# Altium PCB JTAGICE SMD.PcbDoc
Units mm, origin at the board's own origin, x right, y up, seen from the top; angles counter-clockwise.
Board outline 102.05 x 44.18 mm, 2 copper layers (Top Layer, Bottom Layer); 40 components, 35 nets, 194 pads, 33 vias.
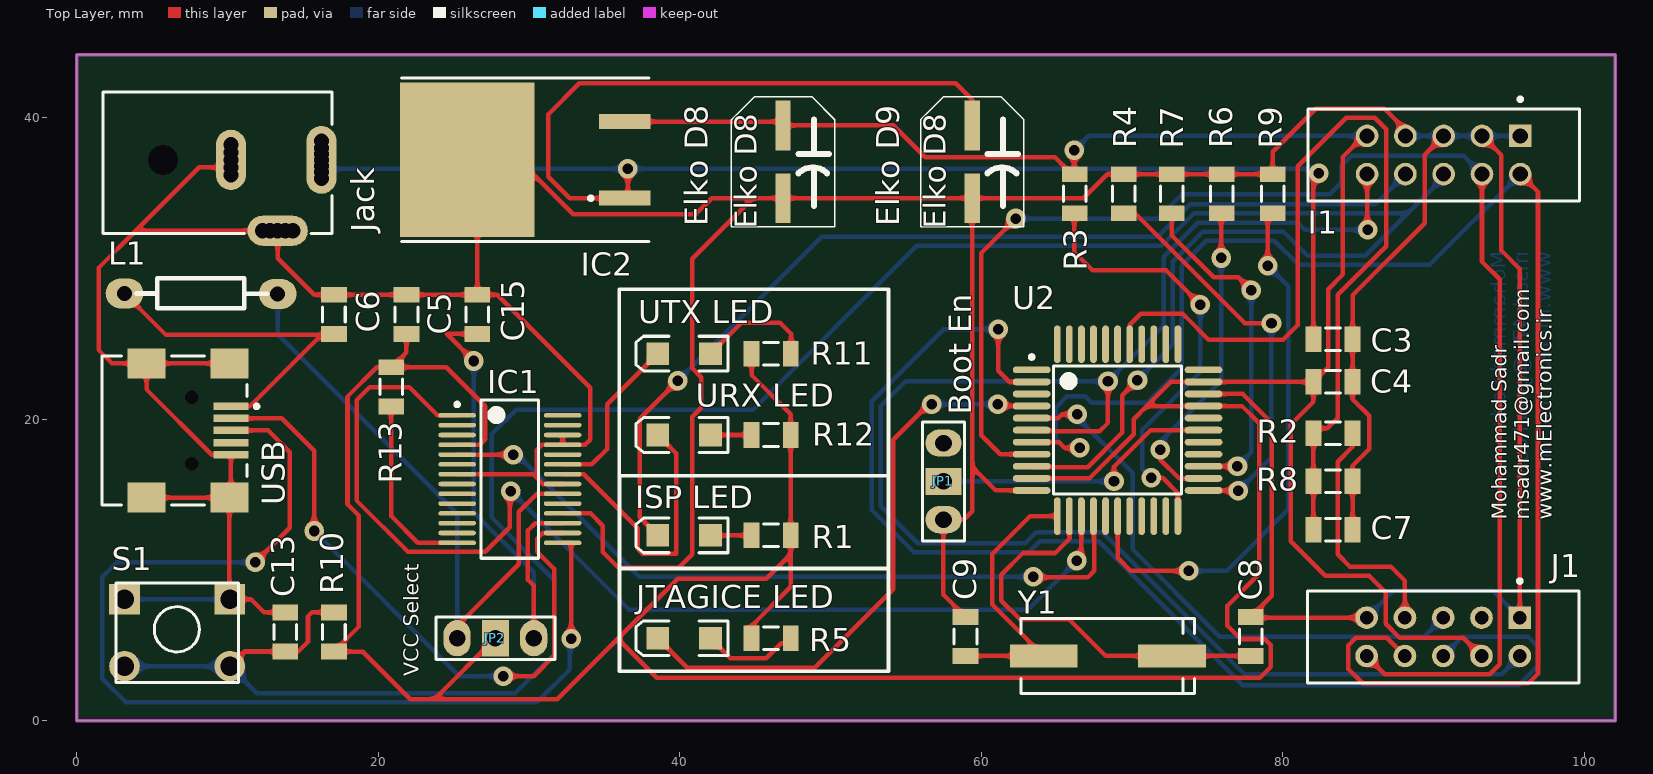
[diagram p0: Top Layer view]
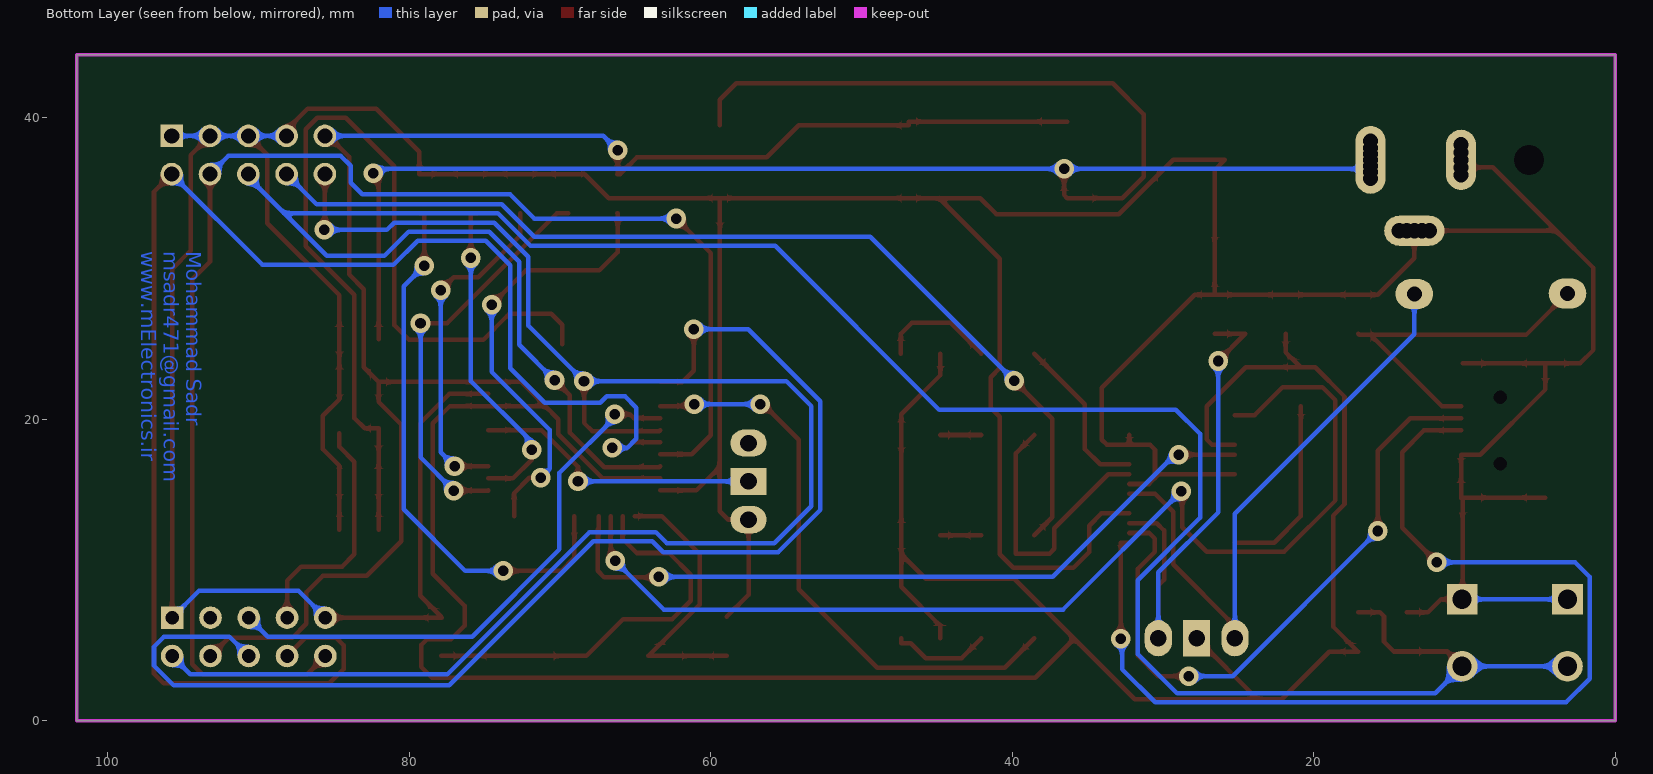
[diagram p1: Bottom Layer view, seen from below]
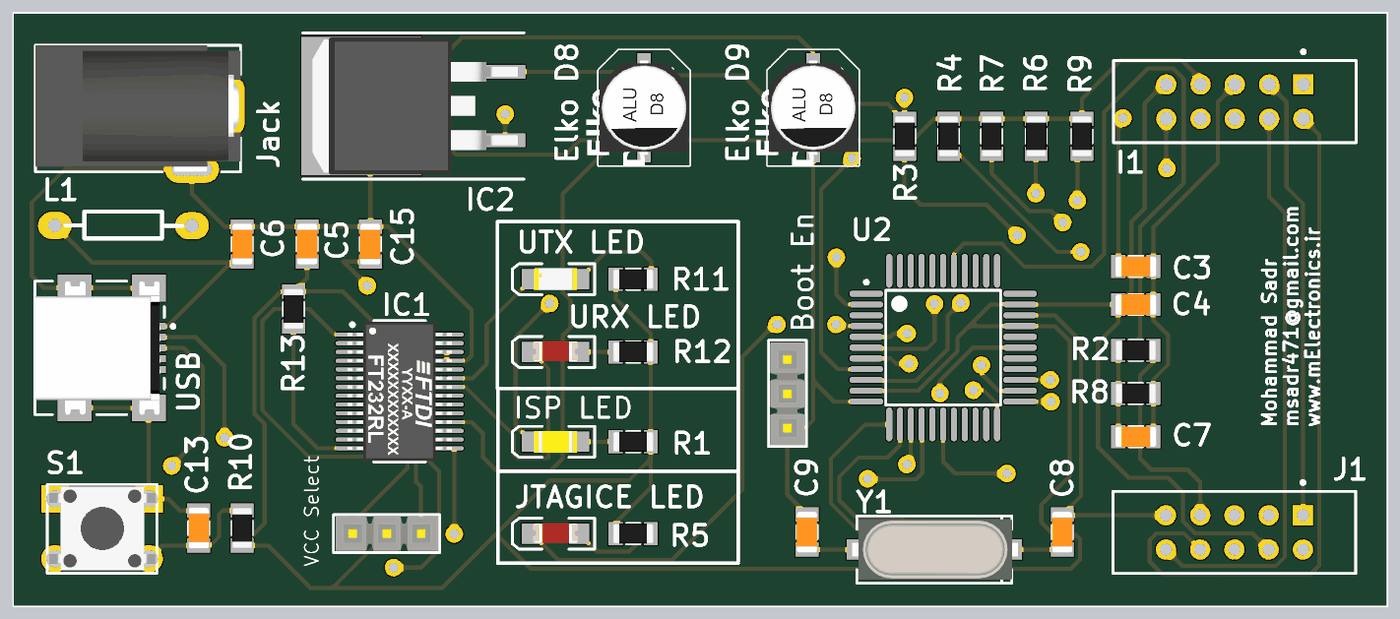
[diagram p2: 3D render of the assembled board from above, using the file's embedded part models]

## Layer stack, top to bottom
Top Solder: solder mask 0.0102, Solder Resist, Dk 3.5
Top Layer: signal copper 0.0356
Dielectric 1: dielectric 0.32, FR-4, Dk 4.8
Bottom Layer: signal copper 0.0356
Bottom Solder: solder mask 0.0102, Solder Resist, Dk 3.5

## Board outline
0,0 102.05,0 102.05,44.18 0,44.18

## Design rules (kind name [scope] priority, off if disabled: settings)
Clearance [All] p1: gap=0.3 ignorepadtopadclearanceinfootprint=FALSE
HoleToHoleClearance [All] p1: gap=0 allowstackedmicrovias=TRUE
MinimumSolderMaskSliver [All] p1: minsoldermaskwidth=0.1
PlaneClearance [All] p1: clearance=0.3
PlaneConnect [All] p1: planeconnectstyle=Relief reliefexpansion=0.3 reliefentries=4 reliefconductorwidth=0.3 reliefairgap=0.3
PolygonConnect [All] p1: connectstyle=Relief reliefconductorwidth=0.254 reliefentries=4 polygonreliefangle="90 Angle" airgapwidth=0.3
RoutingVias [All] p1: holewidth=0.7 width=1.3 viastyle="Through Hole" minholewidth=0.7 minwidth=1.3 maxholewidth=0.7 maxwidth=1.3
SMDNeckDown [All] p1: percent=100.000
SilkToSilkClearance [All] p1: silktosilkclearance=0
SilkToSolderMaskClearance [IsPad] p1: minsilkscreentomaskgap=0 clearancetoexposedcopper=TRUE
SolderMaskExpansion [All] p1: expansion=0.1
Width [All] p1: maxlimit=0.3 minlimit=0.3 preferedwidth=0.3 minimp=50.000000 maximp=50.000000 favimp=50.000000
24 further rules are at their usual default settings.

## Components (designator, comment, footprint, x,y, rotation, side; value= is the part's Value field where it differs from the comment)
C3 "100nF" SMD_CAP_1206 82.03,25.31 r0 top
C4 "100nF" SMD_CAP_1206 82.03,22.48 r0 top
C5 "100nF" SMD_CAP_1206 21.87,25.664 r90 top
C6 "100nF" SMD_CAP_1206 17.06,25.664 r90 top
C7 "100nF" SMD_CAP_1206 82.03,12.68 r0 top
C8 "22pF" SMD_CAP_1206 77.88,6.896 r270 top
C9 "22pF" SMD_CAP_1206 58.95,6.896 r270 top
C13 "100nF" SMD_CAP_1206 13.83,4.597 r90 top
C15 "100nF" SMD_CAP_1206 26.57,28.26 r270 top
"Elko D8" "100uF" "Elko D8 package" 46.856,34.667 r90 top
"Elko D9" "100uF" "Elko D8 package" 59.4,34.667 r90 top
I1 "ISP" 9181109621#1 90.67,37.528 r180 top
IC1 "FT232RL" SSOP-28_M 28.73,16.032 r0 top
IC2 "L78M05" TO-263 31.125,37.208 r90 top
"ISP LED" "Red" "LED SMD 1206" 40.29,12.297 r180 top
J1 "JTAG" 9181109621#2 90.64,5.57 r180 top
Jack "Power Jack" "Power Jack" 1.73,37.208 r0 top
JP1 "Boot En" "jumper selector" 57.49,18.42 r270 top
JP2 "VCC Select" "jumper selector" 25.23,5.477 r0 top
"JTAGICE LED" "Green" "LED SMD 1206" 40.29,5.477 r180 top
L1 "Ferrite-bead" Ferrite-bead 3.17,28.345 r180 top
R1 "470R" SMD_RES_1206 44.76,12.297 r0 top
R2 "36K" SMD_RES_1206 82.03,19.08 r0 top
R3 "10K" SMD_RES_1206 66.19,33.662 r90 top
R4 "10K" SMD_RES_1206 69.44,33.662 r90 top
R5 "100R" SMD_RES_1206 44.76,5.477 r0 top
R6 "10K" SMD_RES_1206 75.94,33.662 r90 top
R7 "10K" SMD_RES_1206 72.64,33.662 r90 top
R8 "150K" SMD_RES_1206 84.626,15.88 r180 top
R9 "10K" SMD_RES_1206 79.33,36.258 r270 top
R10 "10K" SMD_RES_1206 17.06,4.598 r90 top
R11 "470R" SMD_RES_1206 44.76,24.357 r0 top
R12 "470R" SMD_RES_1206 47.356,18.957 r180 top
R13 "10K" SMD_RES_1206 20.87,23.453 r270 top
S1 "Switch PB" "Switch - Push to On" 6.663,5.837 r0 top
U2 "ATmega16A-PU" 44A_M 69.04,19.28 r0 top
"URX LED" "Red" "LED SMD 1206" 40.29,18.957 r180 top
USB "USB mini" "SMD_Mini USB Connector" 2.38,19.258 r180 top
"UTX LED" "Green" "LED SMD 1206" 40.29,24.357 r180 top
Y1 "7.3728 MHz" "Crystal SMD" 68.957,4.3 r180 top

## Footprints (in the part's own frame and the unit in brackets; to place one, negate y for a bottom-side part, rotate by r counter-clockwise, add the part's x,y. Pads: shape width x height; smd on the part's side, far side on the other; paste and mask are expansions set on the pad)
44A_M [mm] "Thin QFP, 44-Leads, Body 10x10mm, Pitch 0.8mm, IPC Low Density"
  oval 2.5x0.45 smd: 1(-5.7,4) 2(-5.7,3.2) 3(-5.7,2.4) 4(-5.7,1.6) 5(-5.7,0.8) 6(-5.7,0) 7(-5.7,-0.8) 8(-5.7,-1.6) 9(-5.7,-2.4) 10(-5.7,-3.2) 11(-5.7,-4) 23(5.7,-4) 24(5.7,-3.2) 25(5.7,-2.4) 26(5.7,-1.6) 27(5.7,-0.8) 28(5.7,0) 29(5.7,0.8) 30(5.7,1.6) 31(5.7,2.4) 32(5.7,3.2) 33(5.7,4)
  oval 0.45x2.5 smd: 12(-4,-5.7) 13(-3.2,-5.7) 14(-2.4,-5.7) 15(-1.6,-5.7) 16(-0.8,-5.7) 17(0,-5.7) 18(0.8,-5.7) 19(1.6,-5.7) 20(2.4,-5.7) 21(3.2,-5.7) 22(4,-5.7) 34(4,5.7) 35(3.2,5.7) 36(2.4,5.7) 37(1.6,5.7) 38(0.8,5.7) 39(0,5.7) 40(-0.8,5.7) 41(-1.6,5.7) 42(-2.4,5.7) 43(-3.2,5.7) 44(-4,5.7)
  silkscreen extent -5.82,-4.25 4.25,4.97, body extent -5,-5 5,5, height 1.2
9181109621#1 [mm] "Connector; IDC, PCB Transition - 2 Rows, Thru-Hole; 10 Position; Vertical; Pitch 2.54 mm; Body 18.00 x 6.1 x 7.45 mm (LxWxH)"
  rect 1.5x1.5 hole 1: 1(-5.08,-1.27)
  round 1.5 hole 1: 2(-5.08,1.27) 3(-2.54,-1.27) 4(-2.54,1.27) 5(0,-1.27) 6(0,1.27) 7(2.54,-1.27) 8(2.54,1.27) 9(5.08,-1.27) 10(5.08,1.27)
  silkscreen extent -9,-3.82 9,3.05
9181109621#2 [mm] "Connector; IDC, PCB Transition - 2 Rows, Thru-Hole; 10 Position; Vertical; Pitch 2.54 mm; Body 18.00 x 6.1 x 7.45 mm (LxWxH)"
  rect 1.5x1.5 hole 0.9: 1(-5.08,-1.27)
  round 1.5 hole 0.9: 2(-5.08,1.27) 3(-2.54,-1.27) 4(-2.54,1.27) 5(0,-1.27) 6(0,1.27) 7(2.54,-1.27) 8(2.54,1.27) 9(5.08,-1.27) 10(5.08,1.27)
  silkscreen extent -9,-3.82 9,3.05
"Crystal SMD" [mm]
  rect 4.5x1.5 smd: 1(-3.683,0) 2(4.817,0)
  silkscreen extent -5.18,-2.5 6.32,2.5, body extent -5.64,-2.25 6.66,2.25, height 5.18
"Elko D8 package" [mm]
  rect 3.3x1 smd: 1(0,0) 2(4.826,0)
  silkscreen extent -1.9,-3.43 6.73,3.43, body extent -1.09,-3.3 5.91,3.3, height 7.7
Ferrite-bead [mm]
  oval 2.5x2 hole 1: 1(0,0) 2(-10.16,0.025)
  silkscreen extent -9.45,-1.02 -0.79,0.96
"jumper selector" [mm]
  oval 1.8x2.4 hole 1.1: 1(0,0) 3(5.08,0)
  rect 1.8x2.4 hole 1.1: 2(2.54,0)
  silkscreen extent -1.4,-1.4 6.48,1.4, body extent -1.24,-1.27 6.38,1.27, height 10.16
"LED SMD 1206" [mm]
  rect 1.5x1.5 smd: 1(-1.75,0) 2(1.75,0)
  silkscreen extent -2.9,-1.15 3.2,1.15, body extent -1.6,-0.8 1.6,0.8, height 1.11
"Power Jack" [mm] "Power Adaptor Jack"
  round 1.5 hole 1: 1(14.5,-1.25) 1(14.5,-0.8) 1(14.5,-0.4) 1(14.5,0.4) 1(14.5,0.8) 1(14.5,1.25) 2(8.5,-1) 2(8.5,-0.5) 2(8.5,0.5) 2(8.5,1) 3(10.6,-4.7) 3(11.1,-4.7) 3(12.1,-4.7) 3(12.6,-4.7)
  oval 2x4.5 hole 1: 1(14.5,0)
  oval 2x4 hole 1: 2(8.5,0)
  oval 4x2 hole 1: 3(11.6,-4.7)
  round 1.9 hole 2: MH(4,0)
  silkscreen extent 0,-4.9 15.2,4.5, body extent 0,-4.9 15.2,4.5, height 11
SMD_CAP_1206 [mm]
  rect 1.05x1.7 smd: 1(0,0) 2(2.596,0)
  silkscreen extent 0.8,-0.75 1.8,0.75, body extent -0.22,-0.77 2.82,0.75, height 0.75
"SMD_Mini USB Connector" [mm]
  rect 2.3x0.5 smd: 1(-7.85,-1.6) 2(-7.85,-0.8) 3(-7.85,0) 4(-7.85,0.8) 5(-7.85,1.6)
  rect 2.5x2 smd: 6(-7.75,4.45) 7(-2.25,4.45) 8(-7.75,-4.45) 9(-2.25,-4.45)
  round 0.6 hole 0.9 unplated: MH1(-5.25,2.2) MH2(-5.25,-2.2)
  silkscreen extent -9.68,-4.95 0.7,4.95, body extent -8.6,-4.95 0.65,4.95, height 3.93
SMD_RES_1206 [mm] "Chip Resistor, 2-Leads, Body 3.2x1.6mm, IPC High Density _ (0.125 W)"
  rect 1.05x1.7 smd: 1(0,0) 2(2.596,0)
  silkscreen extent 0.8,-0.75 1.8,0.75, body extent -0.23,-0.76 2.82,0.76, height 0.6
SSOP-28_M [mm] "SOP, 28-Leads, Body 10.2x5.3mm, Pitch 0.65mm, IPC Low Density"
  oval 2.5x0.3 smd: 1(-3.5,4.225) 2(-3.5,3.575) 3(-3.5,2.925) 4(-3.5,2.275) 5(-3.5,1.625) 6(-3.5,0.975) 7(-3.5,0.325) 8(-3.5,-0.325) 9(-3.5,-0.975) 10(-3.5,-1.625) 11(-3.5,-2.275) 12(-3.5,-2.925) 13(-3.5,-3.575) 14(-3.5,-4.225) 15(3.5,-4.225) 16(3.5,-3.575) 17(3.5,-2.925) 18(3.5,-2.275) 19(3.5,-1.625) 20(3.5,-0.975) 21(3.5,-0.325) 22(3.5,0.325) 23(3.5,0.975) 24(3.5,1.625) 25(3.5,2.275) 26(3.5,2.925) 27(3.5,3.575) 28(3.5,4.225)
  silkscreen extent -3.62,-5.25 1.9,5.25, body extent -3.88,-5.17 3.88,5.17, height 2.16
"Switch - Push to On" [mil]
  rect 80x80 hole 50: 1(-137.5,87.5) 1(137.5,87.5)
  round 80 hole 50: 2(-137.5,-87.5) 2(137.5,-87.5)
  silkscreen extent -160,-130 160,130, body extent -155,-121 157,123, height 205
TO-263 [mm] "D2-PAK/TO-263-AB; 3 Leads (1 Cropped); Body 15.9 (inc. leads) x 10.4 mm (LxW max)"
  rect 1x3.4 smd: 1(-2.54,-5.225) 3(2.54,-5.225)
  rect 10.25x8.9 smd: 4(0,5.225)
  silkscreen extent -5.43,-6.82 5.43,9.57, body extent -5.08,-6.4 5.08,8.86, height 4.98

## Part data
C3 C4 C5 C6 C7 C8 C9 C13 C15: library part Cap-Bipolar, "Bipolar Capacitor", Voltage=100V, Adding Date=1387/12/20, Designer="Saeid Jorablo", Organazation=ControTec
"Elko D8" "Elko D9": library part "Elko D8 package", Elko D8 package=100uF
I1 J1: library part "09 18 110 9621", "Flat Cable Connector (IDC), PCB Transition Connector, 2 Rows, Solder Pin, 10 Contacts", PackageDocument=26-Nov-2003, ComponentLink1Description="Manufacturer Link", ComponentLink1URL=http://www.harting.com/, ComponentLink2Description="Selection Guide", ComponentLink2URL=http://www.harting.com/imperia/md/content/steckverbinderundsystemkomponenten/folder/interface_engl_chapter_09.pdf, DatasheetDocument=Sep-2003, DrillSize="Corresponds to nominal value.", PackageReference=9181109621, PCB_Layout="Complies with manufacturer's recommendation.", Published=15-Nov-2004, Publisher="Altium Limited"
IC1: "USB UART Asynchronous Serial Data Transfer Chip, SSOP-28, Tape and Reel", ComponentLink1Description="Manufacturer Link", ComponentLink1URL=http://www.ftdichip.com/Products/ICs/FT232R.htm, ComponentLink2Description=Datasheet, ComponentLink2URL=http://www.ftdichip.com/Support/Documents/DataSheets/ICs/DS_FT232R.pdf, DatasheetVersion="ver 2.07, Jul-2010", PackageDescription="28-Pin Small Outline Package 0.65 mm Pitch", PackageReference=SSOP-28, PackageVersion=2010, Published=19-Aug-2010, Publisher="Altium Limited"
IC2: "Precision 500mA Regulator"
"ISP LED" "JTAGICE LED" "URX LED" "UTX LED": library part LED, "LED", Adding Date=1387/12/22, Designer="Saeid Jorablo", Organazation=ControTec, Size="SMD 1206"
  "ISP LED" "URX LED": Color=Red
  "JTAGICE LED" "UTX LED": Color=Green
JP1 JP2: library part "Jumper Selector", "Jumper Selector"
R1 R2 R3 R4 R5 R6 R7 R8 R9 R10 R11 R12 R13: library part Resistor, "Resistor", Power="1/4 W", Tolerance=5%
S1: "Push Button Switch"
U2: "8-bit AVR Microcontroller, 16KB Flash, 512 Bytes EEPROM, 1KB SRAM, 40-pin PDIP, Industrial Grade (-40°C to 85°C)", Supplier Part Number 1=ATMEGA16A-PU-ND, Code_JEDEC=MS-011-AC, ComponentLink1Description="Manufacturer Link", ComponentLink1URL=http://www.atmel.com/products/avr/default.asp?, ComponentLink2Description="ATmega16A Datasheet", ComponentLink2URL=http://www.atmel.com/dyn/resources/prod_documents/doc8154.pdf, ComponentLink3Description="ATmega16A Summary", ComponentLink3URL=http://www.atmel.com/dyn/resources/prod_documents/8154S.pdf, ComponentLink4Description="Atmel.com Home", ComponentLink4URL=http://www.atmel.com, DatasheetVersion="revB, Jul-2009", PackageDescription="40-lead (0.600\"/15.24mm Wide) Plastic Dual Inline Package (PDIP)", PackageReference=40P6, PackageVersion="revB, Sep-2001", Published=1-Apr-2010, Publisher="Altium Limited", Supplier 1=Digi-Key, Supplier 2=Farnell, Supplier 3=Mouser, Supplier Part Number 2=1704561, Supplier Part Number 3=556-ATMEGA16A-PU
USB: "mini USB Connector"
Y1: library part XTAL, "XTAL Crystal", Company=E.P.I.L, Design Date=11/04/2011
Jack: Adding Date=10/21/2009, Company=Personal, Designer="Saeid Jorablo", Project Name=Laser

## Via types
v1: diameter 1.3, hole 0.7, Top Layer to Bottom Layer, 33 vias

## Nets (pads, with @x,y where several pads share a name; then routed paths per layer and width w, separated by ;. In a path a pad name is that pad's centre, name@x,y a point inside that pad or via, vN(x,y) a via of type N, cw(c..) or ccw(c..) an arc to the next point about the centre after c; other vN are vias at no path point)
GND: "Elko D8.1" "Elko D9.1" C3.2 C4.2 C5.2 C6.2 C7.2 C8.1 C9.1 C13.2 C15.1 I1.1 I1.3 I1.5 I1.7 IC1.7 IC1.18 IC1.21 IC1.25 IC1.26 IC2.4 J1.1 J1.9 Jack.2 Jack.3 JP1.3 R4.2 R6.2 R7.2 R8.1 R9.1 S1.1 U2.11 U2.31 USB.5 USB.6 USB.7 USB.8 USB.9 | length 374.7
  Top Layer w0.3: USB.7 USB.6 10.13,8.085 10.155,8.06 11.556,8.06 12.423,7.193 C13.2 ; USB.8 USB.9 ; USB.6@10.23,14.77 USB.5 8.952,17.657 4.63,21.979 USB.9 ; Jack.2@10.23,38.208 10.23,37.708 10.23,37.208 10.23,36.708 8.115,36.708 3.915,32.508 ; IC1.7 30.275,16.357 30.53,16.102 ; IC1.18 34.082,13.757 34.894,12.945 34.894,11.197 35.94,10.151 39.928,10.151 40.817,11.04 40.817,20.159 41.426,20.768 41.426,22.787 40.817,23.397 40.817,30.654 44.83,34.668 ; IC1.21 30.925,15.707 30.53,16.102 ; IC1.26 IC1.25 ; C9.1 57.49,8.356 JP1.3 58.843,13.34 59.4,13.897 59.4,16.83 ; U2.11 60.95,15.28 59.4,16.83 ; U2.31 77.34,21.68 79.27,19.75 79.27,8.286 C8.1 ; C8.1@77.84,6.84 J1.9 ; R9.1 R9.1@79.323,36.258 ; C7.2 R8.1 84.626,16.927 85.724,18.025 85.724,20.229 84.626,21.327 C4.2 C3.2 84.626,28.23 89.407,33.011 89.407,37.535 I1.5 ; I1.7 88.13,39.208 86.74,40.598 82.186,40.598 79.323,37.735 R9.1@79.323,36.258 ; I1.3 94.5,37.508 94.5,31.19 95.72,29.97 J1.1 ; 3.915,32.508 1.447,30.039 1.447,24.596 2.336,23.707 USB.9 ; 3.915,32.508 12.33,32.508 12.83,32.508 13.33,32.508 13.33,30.676 15.746,28.26 C6.2 C5.2 C15.1 ; C15.1 26.57,36.538 IC2.4 29.311,37.208 32.923,33.595 41.045,33.595 42.118,34.668 44.83,34.668 ; C15.1 27.888,28.26 34.06,22.088 34.06,18.65 33.717,18.307 IC1.25 ; 30.53,16.102 30.53,17.977 30.86,18.307 IC1.25 ; 44.83,34.668 46.856,34.668 59.4,34.668 ; 59.4,16.83 59.4,17.855 59.39,17.865 59.39,34.658 59.4,34.668 ; 59.4,34.668 66.76,34.668 68.35,36.258 R4.2 R7.2 R6.2 77.621,36.258 R9.1@79.323,36.258
  Bottom Layer w0.3: S1.1@3.17,8.06 S1.1@10.155,8.06 ; Jack.2@10.23,36.708 10.23,37.208 Jack.2@10.23,37.708 ; Jack.3@13.33,32.508 Jack.3@13.83,32.508 ; J1.9 87.34,8.62 93.94,8.62 J1.1 ; I1.7 I1.5 I1.3 I1.1
LED: "ISP LED.2" I1.8 | length 65.7
  Top Layer w0.3: 38.54,12.297 37.337,13.5 37.337,20.032 v1(39.863,22.557)
  Bottom Layer w0.3: v1(39.863,22.557) 49.42,32.115 71.704,32.115 73.861,34.271 86.143,34.271 I1.8
MISO: I1.2 J1.8 U2.7 | length 103.1
  Top Layer w0.3: U2.7 65.152,18.48 65.532,18.1 v1(66.52,18.1) ; J1.8 87.497,4.903 87.492,4.903 86.892,5.503 84.835,5.503 84.352,5.02 84.352,3.42 85.292,2.48 96.29,2.48 96.925,3.115 96.925,35.083 I1.2
  Bottom Layer w0.3: v1(66.52,18.1) 65.532,18.1 64.93,18.702 64.93,20.77 65.68,21.52 66.9,21.52 67.321,21.098 71.017,21.098 73.296,23.377 73.296,30.21 74.926,31.841 79.44,31.841 81.04,30.241 89.733,30.241 I1.2
MOSI: I1.10 J1.2 U2.6 | length 107.3
  Top Layer w0.3: U2.6 63.42,19.2 67.844,19.2 68.402,19.758 v1(68.402,22.525) ; I1.10 85.59,32.884 85.266,32.56 v1(85.63,32.56)
  Bottom Layer w0.3: v1(85.63,32.56) 81.48,32.56 80.999,33.041 74.356,33.041 72.096,30.78 72.096,26.218 v1(68.402,22.525) 54.975,22.525 53.329,20.879 53.329,14.235 55.782,11.783 62.903,11.783 63.631,12.511 68.04,12.511 77.461,3.09 94.51,3.09 J1.2
NetC3_1: "Elko D9.2" C3.1 IC2.1 Jack.1 | length 123.4
  Top Layer w0.3: Jack.1@16.23,36.808 16.23,37.208 16.23,37.608 16.23,38.008 Jack.1@16.23,38.458 ; v1(36.56,36.61) 36.56,34.878 IC2.1 32.699,34.668 31.27,36.097 31.27,40.22 33.34,42.29 58.312,42.29 59.4,41.202 59.4,39.494 ; C3.1 82.03,35.972 v1(82.371,36.313)
  Bottom Layer w0.3: Jack.1@16.23,35.958 Jack.1@16.23,36.313 ; Jack.1@16.23,37.208 16.23,36.808 16.23,36.408 Jack.1@16.23,36.313 ; v1(82.371,36.313) 82.074,36.61 v1(36.56,36.61) 16.527,36.61 Jack.1@16.23,36.313
NetC6_1: C6.1 L1.1 USB.1 | length 23
  Top Layer w0.3: L1.1 5.921,25.594 C6.1@16.23,25.594 ; USB.1 11.493,20.857 C6.1@16.23,25.594 ; C6.1 16.99,25.594 C6.1@16.23,25.594
NetC7_1: C7.1 R2.1 R8.2 U2.38 | length 61
  Top Layer w0.3: U2.38 69.84,26.28 70.57,27.01 73.35,27.01 73.54,26.82 73.54,26.814 75.073,25.282 80.012,25.282 80.982,26.252 80.982,36.778 84.202,39.998 86.105,39.998 86.87,39.233 86.87,31.48 83.641,28.251 83.641,20.082 82.955,19.397 82.03,19.397 R2.1 R8.2 C7.1
NetC8_2: C8.2 U2.13 Y1.1 | length 26.8
  Top Layer w0.3: U2.13 65.84,12.055 64.915,11.13 62.77,11.13 61.33,9.69 61.33,7.959 62.539,6.75 65.799,6.75 68.249,4.3 Y1.1 C8.2
NetC9_2: C9.2 U2.12 Y1.2 | length 18.7
  Top Layer w0.3: C9.2 Y1.2 60.73,7.71 60.73,11.06 63.25,13.58 U2.12
NetC15_2: C15.2 IC1.17 JP2.3 | length 34.4
  Top Layer w0.3: v1(26.339,23.867) 24.542,25.664 C15.2 ; JP2.3 30.31,8.976 29.93,9.356 29.93,12.627 30.41,13.107 IC1.17
  Bottom Layer w0.3: v1(26.339,23.867) 26.339,13.819 30.31,9.847 JP2.3
NetIC1_14: IC1.14 R13.2 | length 12.4
  Top Layer w0.3: R13.2 20.852,20.857 20.852,13.58 22.625,11.807 IC1.14
NetIC1_15: IC1.15 USB.3 | length 71.6
  Top Layer w0.3: USB.3 12.693,19.257 14.13,17.82 14.13,12.801 v1(11.835,10.507) ; IC1.15 32.79,11.807 v1(32.79,5.452)
  Bottom Layer w0.3: v1(11.835,10.507) 2.666,10.507 1.701,9.541 1.701,2.785 3.266,1.22 30.514,1.22 32.714,3.42 32.714,5.376 v1(32.79,5.452)
NetIC1_16: IC1.16 USB.2 | length 42.3
  Top Layer w0.3: USB.2 13.593,20.057 15.747,17.903 v1(15.747,12.59) ; v1(28.28,2.96) 30.311,2.96 31.66,4.309 31.66,10.088 30.53,11.218 30.53,12.077 30.91,12.457 IC1.16
  Bottom Layer w0.3: v1(15.747,12.59) 25.377,2.96 v1(28.28,2.96)
NetIC1_20: IC1.20 JP2.1 L1.2 | length 41.2
  Top Layer w0.3: JP2.1 25.23,6.29 29.33,10.39 29.33,13.858 30.53,15.057 IC1.20
  Bottom Layer w0.3: L1.2 13.33,25.645 25.23,13.745 JP2.1
NetIC1_22: "URX LED.2" IC1.22 | length 18.9
  Top Layer w0.3: IC1.22 33.62,16.357 37.21,12.767 37.21,11.408 37.527,11.091 39.75,11.091 39.75,17.748 38.54,18.957
NetIC1_23: "UTX LED.2" IC1.23 | length 11.1
  Top Layer w0.3: IC1.23 34.16,17.007 35.178,18.025 35.178,20.995 38.54,24.357
"NetISP LED_1": "ISP LED.1" R1.1 | length 2.7
  Top Layer w0.3: 42.04,12.297 R1.1
NetJP1_2: JP1.2 U2.28 | length 19.2
  Top Layer w0.3: v1(68.8,15.88) 68.8,16.857 71.223,19.28 U2.28
  Bottom Layer w0.3: JP1.2 v1(68.8,15.88)
"NetJTAGICE LED_1": "JTAGICE LED.1" R5.2 | length 6.6
  Top Layer w0.3: 42.04,5.477 43.361,4.157 45.744,4.157 46.735,5.147 47.356,5.147 R5.2
"NetJTAGICE LED_2": "JTAGICE LED.2" U2.4 | length 38.8
  Top Layer w0.3: 38.54,5.477 40.496,3.522 48.945,3.522 54.152,8.729 54.152,18.635 56.507,20.99 56.607,20.89 56.717,21 v1(56.72,21) ; v1(61.09,21) 61.21,20.88 U2.4
  Bottom Layer w0.3: v1(56.72,21) v1(61.09,21)
NetR3_1: R3.1 U2.22 | length 29.4
  Top Layer w0.3: R3.1 66.166,33.662 66.166,31.094 67.39,29.87 72.27,29.87 v1(74.53,27.61) ; v1(71.28,16.12) 72.03,16.12 73.04,15.11 U2.22
  Bottom Layer w0.3: v1(71.28,16.12) 70.687,16.713 70.687,19.295 74.53,23.138 v1(74.53,27.61)
NetR4_1: R4.1 U2.23 | length 27.2
  Top Layer w0.3: R4.1 70.198,33.662 77.478,26.382 v1(79.247,26.382) ; U2.23 74.75,15.27 v1(77.04,15.27)
  Bottom Layer w0.3: v1(77.04,15.27) 79.247,17.477 v1(79.247,26.382)
NetR6_1: R6.1 U2.24 | length 21.9
  Top Layer w0.3: v1(71.88,17.98) 71.88,17.315 73.115,16.08 U2.24 ; R6.1@75.488,33.662 R6.1 75.89,33.612 75.91,33.592 v1(75.91,30.7)
  Bottom Layer w0.3: v1(71.88,17.98) 71.88,18.507 75.91,22.536 v1(75.91,30.7)
NetR7_1: R7.1 U2.25 | length 22.6
  Top Layer w0.3: R7.1 72.64,32.19 75.41,29.42 77.05,29.42 v1(77.91,28.56) ; U2.25 76.98,16.88 v1(76.99,16.89)
  Bottom Layer w0.3: v1(76.99,16.89) 77.91,17.81 v1(77.91,28.56)
NetR9_2: R9.2 U2.17 | length 36.7
  Top Layer w0.3: U2.17 69.04,10.811 69.911,9.94 v1(73.77,9.94) ; v1(78.993,30.192) 78.993,33.662 R9.2
  Bottom Layer w0.3: v1(73.77,9.94) 76.27,9.94 80.365,14.035 80.365,28.82 v1(78.993,30.192)
NetR11_2: "UTX LED.1" R11.2 | length 7.8
  Top Layer w0.3: 42.04,24.357 44.073,26.39 46.66,26.39 47.39,25.66 R11.2@47.39,24.34
NetR12_2: "URX LED.1" R12.2 | length 2.7
  Top Layer w0.3: 42.04,18.957 R12.2
RESET: C13.1 I1.6 R10.2 S1.2 U2.9 | length 164.4
  Top Layer w0.3: S1.2@10.155,3.615 11.138,4.597 C13.1 14.702,4.597 15.34,5.236 15.34,6.928 15.606,7.194 R10.2 ; U2.9 63.41,16.81 67.049,16.81 69.36,19.121 69.36,21.6 v1(70.357,22.597)
  Bottom Layer w0.3: S1.2@3.17,3.615 10.155,3.615 11.95,1.82 29.065,1.82 31.673,4.428 31.673,9.333 27.54,13.466 27.54,19.03 29.151,20.641 44.855,20.641 55.729,31.515 71.953,31.515 74.109,33.671 88.297,33.671 ; v1(70.357,22.597) 72.696,24.936 72.696,30.459 74.677,32.441 80.04,32.441 81.64,30.841 85.466,30.841 88.297,33.671 ; I1.6 90.67,36.044 88.297,33.671
RXD: IC1.1 U2.14 | length 74.6
  Top Layer w0.3: IC1.1 23.928,20.257 22.046,22.14 19.441,22.14 18.56,21.259 18.56,14.617 21.97,11.207 27.097,11.207 28.73,12.84 28.73,15.18 v1(28.78,15.23) ; v1@66.344,10.871 v1(66.344,10.608) 66.64,10.904 U2.14
  Bottom Layer w0.3: v1(28.78,15.23) 36.63,7.38 63.116,7.38 v1(66.344,10.608)
SCK: I1.4 J1.10 U2.8 | length 95.6
  Top Layer w0.3: v1(62.28,33.316) 59.99,31.026 59.99,18.95 61.26,17.68 U2.8 ; J1.10 86.77,3.09 93.725,3.09 94.385,3.75 94.385,29.277 93.21,30.453 I1.4
  Bottom Layer w0.3: v1(62.28,33.316) 71.703,33.316 73.307,34.92 83.12,34.92 83.88,35.68 83.88,36.81 84.551,37.481 91.987,37.481 I1.4
SS: J1.5 U2.5 | length 37.4
  Top Layer w0.3: U2.5 65.111,20.08 65.361,20.33 v1(66.37,20.33)
  Bottom Layer w0.3: v1(66.37,20.33) 66.187,20.33 66.167,20.31 70.03,16.447 70.03,11.369 75.82,5.579 89.379,5.579 J1.5
TMS: J1.6 U2.2 | length 81.4
  Top Layer w0.3: v1(61.12,25.98) 61.12,23.223 61.863,22.48 U2.2
  Bottom Layer w0.3: v1(61.12,25.98) 57.509,25.98 52.729,21.2 52.729,13.986 55.533,11.183 63.151,11.183 63.879,11.911 67.791,11.911 77.349,2.353 95.63,2.353 96.925,3.649 96.925,4.919 96.265,5.579 91.919,5.579 J1.6
TXD: IC1.5 U2.15 | length 49.5
  Top Layer w0.3: IC1.5 28.953,17.657 v1(28.96,17.65) ; v1(63.44,9.55) 63.482,9.508 67.055,9.508 67.49,9.943 67.49,12.691 67.44,12.691 U2.15
  Bottom Layer w0.3: v1(28.96,17.65) 29.215,17.65 37.315,9.55 v1(63.44,9.55)
VCC: "Elko D8.2" C4.1 C5.1 I1.9 IC1.4 IC2.3 J1.4 JP2.2 R1.2 R3.2 R5.1 R10.1 R11.1 R12.1 R13.1 U2.10 U2.30 U2.32 | length 290.8
  Top Layer w0.3: 18.966,4.59 17.06,4.59 18.72,6.25 18.72,13.609 17.96,14.369 17.96,21.508 19.905,23.453 R13.1 ; 18.97,4.57 18.97,4.586 22.116,1.44 23.733,1.44 ; C5.1 21.87,24.453 R13.1 ; IC1.4 26.748,18.307 27.101,18.66 27.101,20.87 24.517,23.453 R13.1 ; JP2.2 23.733,1.44 ; IC2.3 46.856,39.748 46.856,39.494 54.156,39.494 56.27,37.38 64.892,37.38 66.014,36.258 R3.2@66.166,36.258 ; R5.1 44.76,6.285 47.356,8.881 47.356,11.04 ; R11.1 44.76,22.932 47.356,20.336 R12.1 47.356,15.612 R1.2 47.356,11.04 ; U2.10 67.174,16.08 70.105,19.01 70.105,20.006 70.979,20.88 ; v1(66.166,37.837) R3.2@66.166,36.258 ; R3.2 R3.2@66.166,36.258 ; I1.9 85.364,38.798 83.99,37.424 83.99,29.61 83.006,28.626 83.006,23.456 C4.1 ; J1.4 91.977,5.503 87.74,5.503 86.816,6.427 86.816,8.514 85.72,9.61 82.811,9.61 80.52,11.901 80.52,19.65 82.03,21.16 C4.1 ; 23.733,1.44 31.877,1.44 35.889,5.452 ; 35.889,5.452 39.857,9.42 45.736,9.42 47.356,11.04 ; 35.889,5.452 38.48,2.861 78.485,2.861 79.196,3.572 79.196,5.033 78.802,5.427 77.215,5.427 76.326,6.316 76.326,7.636 78.434,9.745 78.434,19.737 77.291,20.88 U2.30 70.979,20.88 ; 70.979,20.88 72.579,22.48 U2.32 C4.1
  Bottom Layer w0.3: v1(66.166,37.837) 67.127,38.798 I1.9
VTG: J1.7 R2.2 | length 16.1
  Top Layer w0.3: R2.2 84.626,18.177 83.641,17.192 83.641,11.04 84.454,10.227 87.173,10.227 88.1,9.3 J1.7
pads on no net: IC1.2 IC1.3 IC1.6 IC1.8 IC1.9 IC1.10 IC1.11 IC1.12 IC1.13 IC1.19 IC1.24 IC1.27 IC1.28 J1.3 Jack.MH JP1.1 U2.1 U2.3 U2.16 U2.18 U2.19 U2.20 U2.21 U2.26 U2.27 U2.29 U2.33 U2.34 U2.35 U2.36 U2.37 U2.39 U2.40 U2.41 U2.42 U2.43 U2.44 USB.4 USB.MH1 USB.MH2

## Keep-outs
Keep-Out Layer:
  lines w0.254: 0,0 1.24,0 102.05,0 102.05,44.18 0,44.18 0,0

## Other copper
Bottom Layer:
  text "Mohammad Sadr / msadr471@gmail.com / www.mElectronics.ir" at 97.78,31.15 h1 r90

## Silkscreen, mask and mechanical layers (free items; w line width, h text height)
Top Overlay:
  lines w0.254: 36.01,10.357 36.01,3.287 53.84,3.287 53.84,10.357 ; 35.99,16.258 36.01,16.258 36.01,10.108 53.84,10.108 53.84,16.258 ; 35.99,16.258 35.99,28.627 53.84,28.627 53.84,16.258 ; 35.99,16.258 53.84,16.258
  text "Mohammad Sadr / msadr471@gmail.com / www.mElectronics.ir" at 97.84,13.32 h1 r90

## Dimensions
-3.8,0 to -3.8,44.18 on Top Overlay
0,-3.8 to 102.05,-3.8 on Top Overlay

## Text inside footprints (layer, text, board x,y; h text height)
"Elko D9": Top Overlay "Elko D8" at 58.13,32.635 h2.5 r90
USB: Mechanical 1 "PCB Edge" at 1.948,23.294 h0.25 r270